# Altium PCB PCB.PCBDOC
Units mil, origin at the board's own origin, x right, y up, seen from the top; angles counter-clockwise.
Board outline 6000 x 4000 mil, 2 copper layers (Top Layer, Bottom Layer); 43 components, 0 nets, 165 pads, 7 vias.
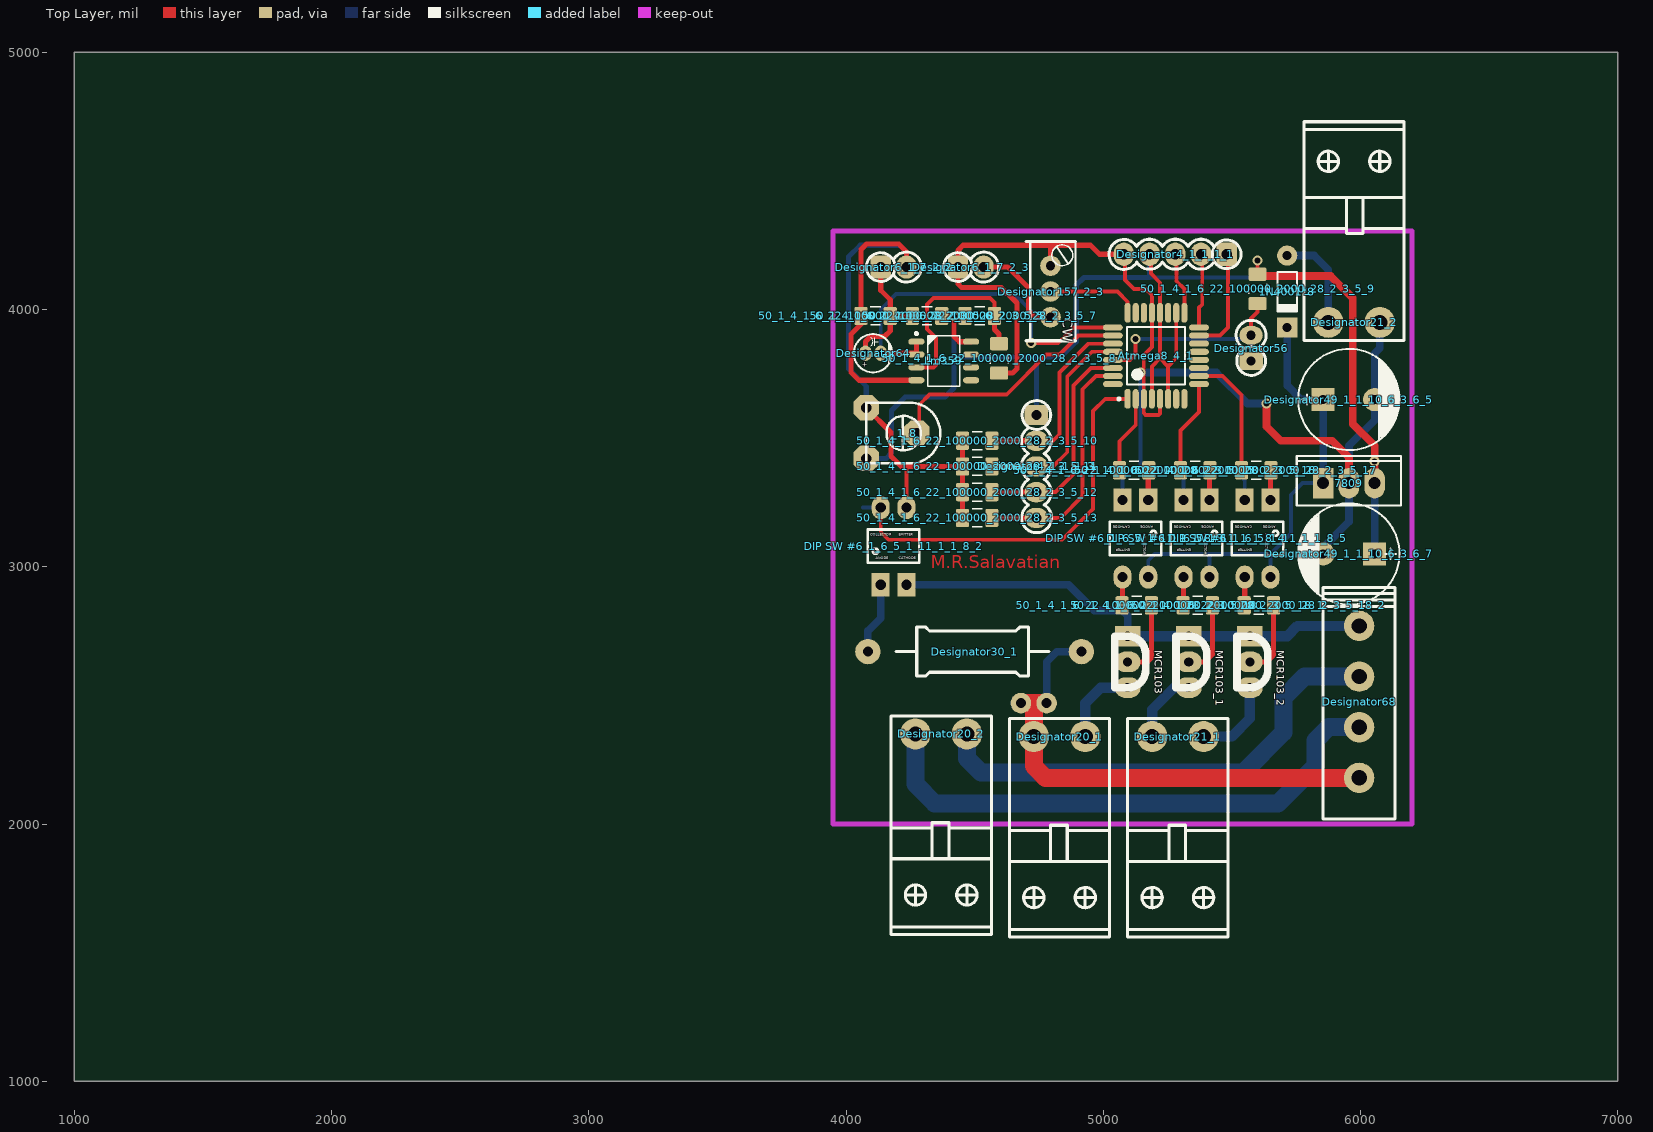
[diagram p0: Top Layer view]
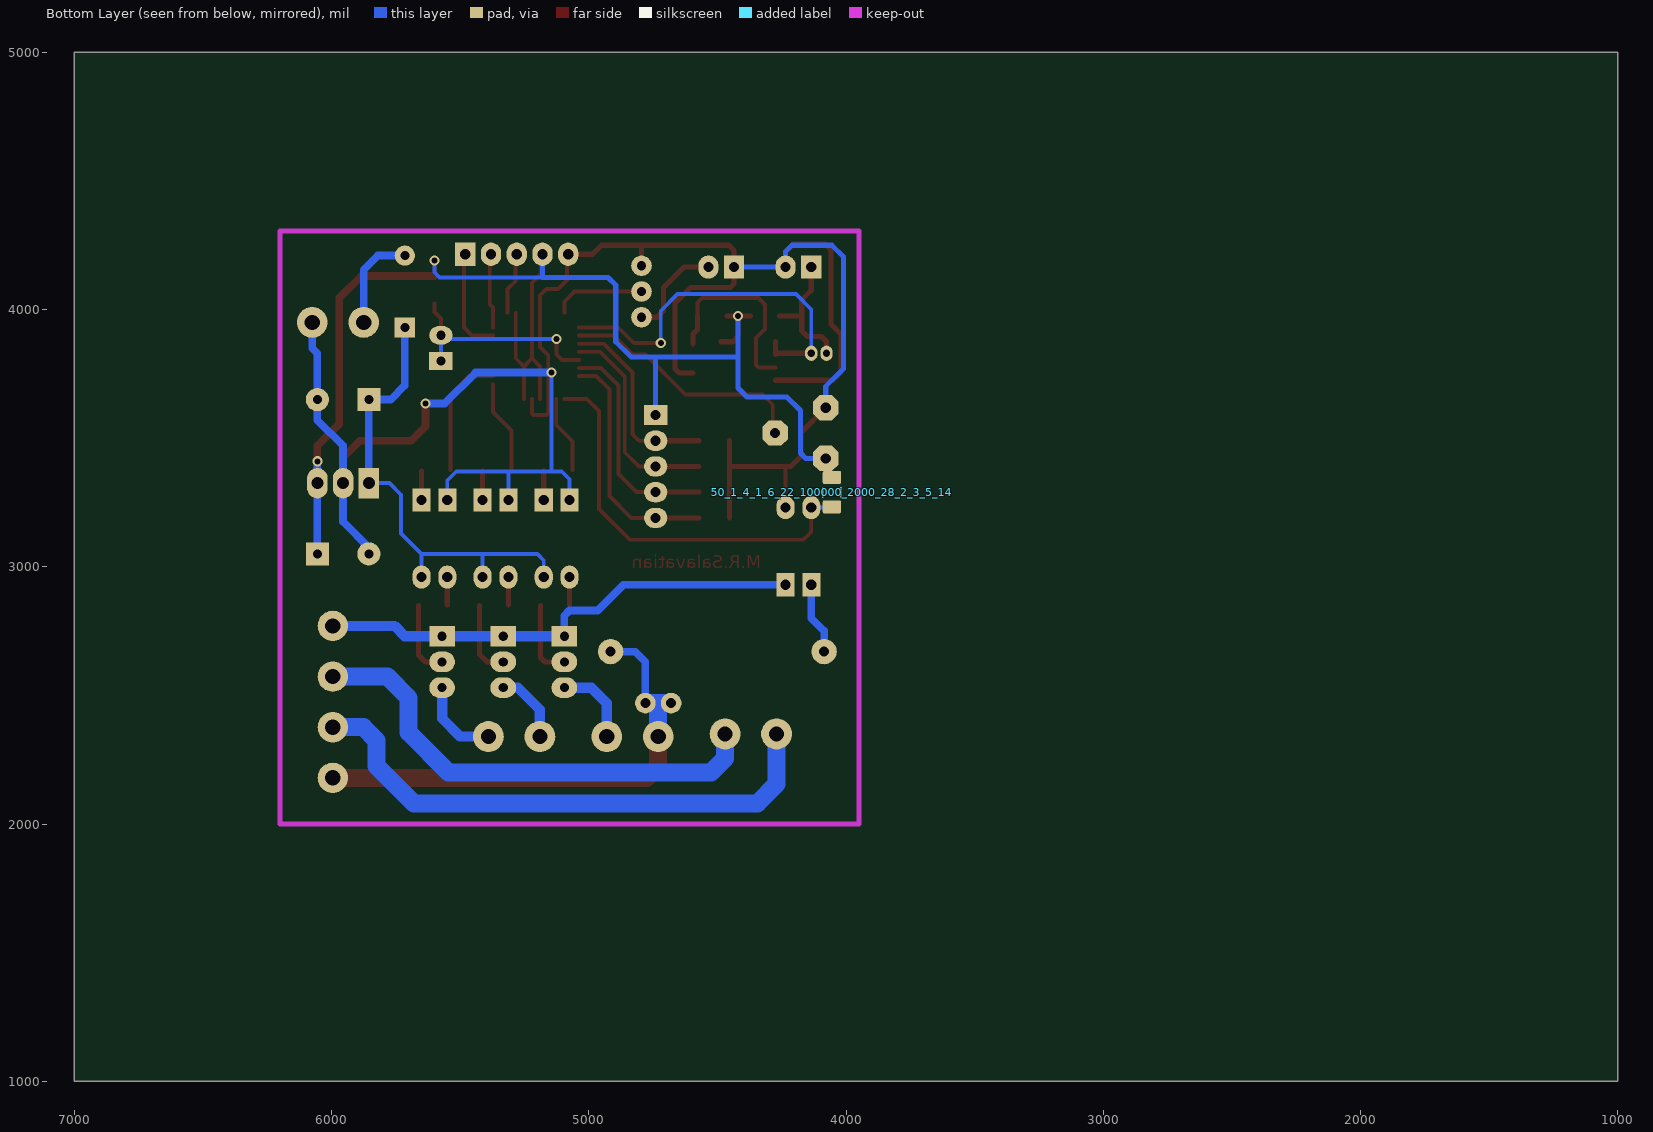
[diagram p1: Bottom Layer view, seen from below]

## Layer stack, top to bottom
Top Layer: signal copper 1.4
Dielectric: dielectric 12.6, FR-4, Dk 4.8
Bottom Layer: signal copper 1.4

## Board outline
1000,1000 7000,1000 7000,5000 1000,5000

## Design rules (kind name [scope] priority, off if disabled: settings)
Clearance [All] p1: gap=10
ComponentClearance [All] p1: gap=10 collisioncheckmode=3 verticalgap=10
PolygonConnect [All] p1: connectstyle=Relief reliefconductorwidth=10 reliefentries=4 polygonreliefangle="90 Angle"
RoutingVias [All] p1: holewidth=28 width=50 viastyle="Through Hole" minholewidth=28 minwidth=50 maxholewidth=28 maxwidth=50
SolderMaskExpansion [All] p1: expansion=4
TestPointUsage [All] p1: valid=0 allowmultiple=FALSE
Testpoint [All] p1: side=15 testpointundercomponent=TRUE minsize=40 maxsize=100 preferedsize=60 minholesize=0 maxholesize=40 preferedholesize=32 testpointgrid=1 style=1023 order=0-112345678
Width [All] p1: maxlimit=10 minlimit=10 preferedwidth=10
18 further rules are at their usual default settings.

## Components (designator, comment, footprint, x,y, rotation, side; value= is the part's Value field where it differs from the comment)
1N4001*8 "Comment" DIO7.1-3.9x1.9 5715,4070 r270 top
50_1_4_1_6_22_100000_2000_28_2_3_5_5 "Comment" RESC3216X70N 4315,3975 r180 top
50_1_4_1_6_22_100000_2000_28_2_3_5_6 "Comment" RESC3216X70N 4115,3975 r180 top
50_1_4_1_6_22_100000_2000_28_2_3_5_7 "Comment" RESC3216X70N 4520,3975 r180 top
50_1_4_1_6_22_100000_2000_28_2_3_5_8 "Comment" RESC3216X70N 4595,3810 r270 top
50_1_4_1_6_22_100000_2000_28_2_3_5_9 "Comment" RESC3216X70N 5600,4080 r90 top
50_1_4_1_6_22_100000_2000_28_2_3_5_10 "Comment" RESC3216X70N 4510,3490 r0 top
50_1_4_1_6_22_100000_2000_28_2_3_5_11 "Comment" RESC3216X70N 4510,3390 r0 top
50_1_4_1_6_22_100000_2000_28_2_3_5_12 "Comment" RESC3216X70N 4510,3290 r0 top
50_1_4_1_6_22_100000_2000_28_2_3_5_13 "Comment" RESC3216X70N 4510,3190 r0 top
50_1_4_1_6_22_100000_2000_28_2_3_5_14 "Comment" RESC3216X70N 4055,3290 r90 bottom
50_1_4_1_6_22_100000_2000_28_2_3_5_15 "Comment" RESC3216X70N 5120,3375 r0 top
50_1_4_1_6_22_100000_2000_28_2_3_5_16 "Comment" RESC3216X70N 5357.5,3375 r0 top
50_1_4_1_6_22_100000_2000_28_2_3_5_17 "Comment" RESC3216X70N 5595,3375 r0 top
50_1_4_1_6_22_100000_2000_28_2_3_5_18 "Comment" RESC3216X70N 5130,2850 r180 top
50_1_4_1_6_22_100000_2000_28_2_3_5_18_1 "Comment" RESC3216X70N 5367.5,2850 r180 top
50_1_4_1_6_22_100000_2000_28_2_3_5_18_2 "Comment" RESC3216X70N 5605,2850 r180 top
7809 "Comment" 221A-04 5955,3325 r0 top
_1_8 "P-1" VR-P1 4370,3500 r180 top
Atmega8_4_1 "Comment" My_32A_M 5205,3820 r90 top
Designator4_1_1_1_1 "Comment" SIP5 5480,4215 r180 top
Designator4_1_1_1_3 "Comment" SIP5 4740,3590 r270 top
Designator6_1_7_2_2 "Comment" SIP2#1 4135,4165 r0 top
Designator6_1_7_2_3 "Comment" SIP2#1 4435,4165 r0 top
Designator20_1 "Comment" PHONIX2 4730,2340 r180 top
Designator20_2 "Comment" PHONIX2 4270,2350 r180 top
Designator21_1 "Comment" PHONIX2 5190,2340 r180 top
Designator21_2 "Comment" PHONIX2 6075,3950 r0 top
Designator30_1 "Comment" AXIAL_1W 4195,2670 r0 top
Designator49_1_1_10_6_3_6_5 "Comment" "cap 04" 5955,3650 r180 top
Designator49_1_1_10_6_3_6_7 "Comment" "cap 04" 5955,3050 r0 top
Designator56 "Comment" SIP2#2 5575,3800 r90 top
Designator64 "Comment" "Cap electrolitic radial 4x7-1.5" 4135,3830 r180 top
Designator68 "Comment" BR_3 5995,2770 r0 top
Designator157_2_3 "Comment" "Multi Turn 02" 4795,4170 r0 top
"DIP SW #6_1_6_5_1_11_1_1_8_2" "Comment" "OPTO #1" 4135,2930 r0 top
"DIP SW #6_1_6_5_1_11_1_1_8_3" "Comment" "OPTO #1" 5175,3260 r180 top
"DIP SW #6_1_6_5_1_11_1_1_8_4" "Comment" "OPTO #1" 5412.5,3260 r180 top
"DIP SW #6_1_6_5_1_11_1_1_8_5" "Comment" "OPTO #1" 5650,3260 r180 top
Lm359 "Comment" SOIC127P600X175-8AN 4380,3800 r0 top
MCR103 "" 2N5551 5095,2730 r180 top
MCR103_1 "" 2N5551 5332.5,2730 r180 top
MCR103_2 "" 2N5551 5570,2730 r180 top

## Footprints (in the part's own frame and the unit in brackets; to place one, negate y for a bottom-side part, rotate by r counter-clockwise, add the part's x,y. Pads: shape width x height; smd on the part's side, far side on the other; paste and mask are expansions set on the pad)
2N5551 [mil]
  oval 100x80 hole 35.43: g(0,100) o(0,200)
  rect 100x80 hole 35.43: i(0,0)
  silkscreen extent -70,0 50,200
221A-04 [mm]
  oval 2.032x3 hole 1.2: A(0,0) G(2.54,0)
  rect 2.032x3 hole 1.2: K(-2.54,0)
  silkscreen extent -5.15,-2.2 5.15,2.7
AXIAL_1W [mm]
  round 2.5 hole 1: 1(-2.794,0) 2(18.288,0)
  silkscreen extent 0,-2.41 15.11,2.41
BR_3 [mm]
  round 3 hole 1.5: 1(0,-5) 2(0,-10) 3(0,0) 4(0,-15)
  silkscreen extent -3.56,-19.06 3.56,3.8
"cap 04" [mil]
  rect 90x90 hole 35.43: 1(100,0)
  round 90 hole 35.43: 2(-100,0)
  silkscreen extent -197,-197 197,197, body extent -198,-197 198,199, height 513
"Cap electrolitic radial 4x7-1.5" [mm] "Cap electrolitic radial 5x11-2-Design:Ali Hafizi"
  oval 1.2x1.5 hole 0.7: 1(0,0) 2(1.5,0)
  silkscreen extent -1.13,-1.88 2.65,1.88, body extent -1.25,-2 2.75,2, height 8.5
DIO7.1-3.9x1.9 [mm]
  round 2 hole 0.9: 1(-3.55,0)
  rect 2x2 hole 0.9: 2(3.55,0)
  silkscreen extent -1.95,-0.95 2.05,0.95
"Multi Turn 02" [mil]
  round 80 hole 35.43: 1(0,0) 2(0,-200) 3(0,-100)
  silkscreen extent -94,-291 96,94, body extent -73,-285 93,89, height 452
My_32A_M [mm]
  oct 1.95x0.6 smd: 1(-4.25,2.8)
  oval 0.6x1.95 smd: 10(-2,-4.25) 13(0.4,-4.25) 14(1.2,-4.25) 25(2.8,4.25) 26(2,4.25) 27(1.2,4.25) 32(-2.8,4.25) B0(-0.4,-4.25) C5(0.4,4.25) D5(-2.8,-4.25) D7(-1.2,-4.25) MISO(2.8,-4.25) MOSI(2,-4.25) RESET(-0.4,4.25) RX(-1.2,4.25) TX(-2,4.25)
  oval 1.95x0.6 smd: 19(4.25,-1.2) 22(4.25,1.2) 24(4.25,2.8) AREF(4.25,-0.4) AVCC(4.25,-2) B5/SCK(4.25,-2.8) C0(4.25,2) D4(-4.25,2) GND(-4.25,-0.4) GND(-4.25,1.2) GND(4.25,0.4) VCC(-4.25,-1.2) VCC(-4.25,0.4) XTAL(-4.25,-2.8) XTAL(-4.25,-2)
  silkscreen extent -4.37,-2.85 2.85,3.77, body extent -3.5,-3.5 3.5,3.5, height 1.2
"OPTO #1" [mil]
  rect 70x90 hole 39.37: ANODE(0,0) CATHODE(100,0)
  oval 70x90 hole 39.37: COLLECTOR(0,300) EMITTER(100,300)
  silkscreen extent -50,85 150,215
PHONIX2 [mil]
  round 120 hole 59.06: 1(0,0) 2(-200,0)
  silkscreen extent -295,-70 95,780
RESC3216X70N [mm] "Chip Resistor, Body 3.2x1.6mm, EIA 1206, IPC Medium Density"
  round 0.508 on Mech15: 0(0,0)
  rrect25% 1.3x1.8 smd: 1(-1.45,0) 2(1.45,0)
  silkscreen extent -0.51,-0.89 0.51,0.89, body extent -1.62,-0.82 1.63,0.83, height 0.69
SIP2#1 [mm]
  rect 2x2.3 hole 1: 1(0,0)
  oval 2x2.3 hole 1: 2(2.54,0)
  silkscreen extent -1.42,-1.48 4.02,1.48
SIP2#2 [mm]
  rect 1.8x2.3 hole 0.9: 1(0,0)
  oval 1.8x2.3 hole 0.9: 2(2.54,0)
  silkscreen extent -1.42,-1.48 4.02,1.48
SIP5 [mm]
  rect 2x2.3 hole 1: 1(0,0)
  oval 2x2.3 hole 1: 2(2.54,0) 3(5.08,0) 4(7.62,0) 5(10.16,0)
  silkscreen extent -1.42,-1.48 11.62,1.5
SOIC127P600X175-8AN [mm] "SOIC, 8-Leads, Body 4.9x3.9mm, Pitch 1.27mm, IPC Medium Density"
  round 1 on Mech15: 0(0,0)
  oval 1.6x0.6 smd: GND(-2.7,-1.905) O1(2.7,0.635) O2(-2.7,1.905) V1+(2.7,-1.905) V1-(2.7,-0.635) V2+(-2.7,-0.635) V2-(-2.7,0.635) VCC(2.7,1.905)
  silkscreen extent -2.82,-2.5 1.6,2.82, body extent -3,-2.45 3,2.45, height 1.75
VR-P1 [mm]
  oct 2.5x2.5 hole 1: 263(7.4,2) 264(7.4,-3) 266(2.4,-0.5)
  oct 0x0 all layers, no hole: 265(4.9,-0.5) 267(-0.1,-0.5)
  silkscreen extent 0.1,-3.5 7.4,2.5

## Part data
7809: library part MC7805BT

## Free pads (board coordinates)
  round 80 hole 39.37: 0(4680,2470) 1(4780,2470)

## Via types
v1: diameter 39.37, hole 23.62, Top Layer to Bottom Layer, 7 vias

## Nets (pads, with @x,y where several pads share a name; then routed paths per layer and width w, separated by ;. In a path a pad name is that pad's centre, name@x,y a point inside that pad or via, vN(x,y) a via of type N, cw(c..) or ccw(c..) an arc to the next point about the centre after c; other vN are vias at no path point)
pads on no net: 1N4001*8.1 1N4001*8.2 50_1_4_1_6_22_100000_2000_28_2_3_5_5.0 50_1_4_1_6_22_100000_2000_28_2_3_5_5.1 50_1_4_1_6_22_100000_2000_28_2_3_5_5.2 50_1_4_1_6_22_100000_2000_28_2_3_5_6.0 50_1_4_1_6_22_100000_2000_28_2_3_5_6.1 50_1_4_1_6_22_100000_2000_28_2_3_5_6.2 50_1_4_1_6_22_100000_2000_28_2_3_5_7.0 50_1_4_1_6_22_100000_2000_28_2_3_5_7.1 50_1_4_1_6_22_100000_2000_28_2_3_5_7.2 50_1_4_1_6_22_100000_2000_28_2_3_5_8.0 50_1_4_1_6_22_100000_2000_28_2_3_5_8.1 50_1_4_1_6_22_100000_2000_28_2_3_5_8.2 50_1_4_1_6_22_100000_2000_28_2_3_5_9.0 50_1_4_1_6_22_100000_2000_28_2_3_5_9.1 50_1_4_1_6_22_100000_2000_28_2_3_5_9.2 50_1_4_1_6_22_100000_2000_28_2_3_5_10.0 50_1_4_1_6_22_100000_2000_28_2_3_5_10.1 50_1_4_1_6_22_100000_2000_28_2_3_5_10.2 50_1_4_1_6_22_100000_2000_28_2_3_5_11.0 50_1_4_1_6_22_100000_2000_28_2_3_5_11.1 50_1_4_1_6_22_100000_2000_28_2_3_5_11.2 50_1_4_1_6_22_100000_2000_28_2_3_5_12.0 50_1_4_1_6_22_100000_2000_28_2_3_5_12.1 50_1_4_1_6_22_100000_2000_28_2_3_5_12.2 50_1_4_1_6_22_100000_2000_28_2_3_5_13.0 50_1_4_1_6_22_100000_2000_28_2_3_5_13.1 50_1_4_1_6_22_100000_2000_28_2_3_5_13.2 50_1_4_1_6_22_100000_2000_28_2_3_5_14.0 50_1_4_1_6_22_100000_2000_28_2_3_5_14.1 50_1_4_1_6_22_100000_2000_28_2_3_5_14.2 50_1_4_1_6_22_100000_2000_28_2_3_5_15.0 50_1_4_1_6_22_100000_2000_28_2_3_5_15.1 50_1_4_1_6_22_100000_2000_28_2_3_5_15.2 50_1_4_1_6_22_100000_2000_28_2_3_5_16.0 50_1_4_1_6_22_100000_2000_28_2_3_5_16.1 50_1_4_1_6_22_100000_2000_28_2_3_5_16.2 50_1_4_1_6_22_100000_2000_28_2_3_5_17.0 50_1_4_1_6_22_100000_2000_28_2_3_5_17.1 50_1_4_1_6_22_100000_2000_28_2_3_5_17.2 50_1_4_1_6_22_100000_2000_28_2_3_5_18.0 50_1_4_1_6_22_100000_2000_28_2_3_5_18.1 50_1_4_1_6_22_100000_2000_28_2_3_5_18.2 50_1_4_1_6_22_100000_2000_28_2_3_5_18_1.0 50_1_4_1_6_22_100000_2000_28_2_3_5_18_1.1 50_1_4_1_6_22_100000_2000_28_2_3_5_18_1.2 50_1_4_1_6_22_100000_2000_28_2_3_5_18_2.0 50_1_4_1_6_22_100000_2000_28_2_3_5_18_2.1 50_1_4_1_6_22_100000_2000_28_2_3_5_18_2.2 7809.A 7809.G 7809.K "DIP SW #6_1_6_5_1_11_1_1_8_2.ANODE" "DIP SW #6_1_6_5_1_11_1_1_8_2.CATHODE" "DIP SW #6_1_6_5_1_11_1_1_8_2.COLLECTOR" "DIP SW #6_1_6_5_1_11_1_1_8_2.EMITTER" "DIP SW #6_1_6_5_1_11_1_1_8_3.ANODE" "DIP SW #6_1_6_5_1_11_1_1_8_3.CATHODE" "DIP SW #6_1_6_5_1_11_1_1_8_3.COLLECTOR" "DIP SW #6_1_6_5_1_11_1_1_8_3.EMITTER" "DIP SW #6_1_6_5_1_11_1_1_8_4.ANODE" "DIP SW #6_1_6_5_1_11_1_1_8_4.CATHODE" "DIP SW #6_1_6_5_1_11_1_1_8_4.COLLECTOR" "DIP SW #6_1_6_5_1_11_1_1_8_4.EMITTER" "DIP SW #6_1_6_5_1_11_1_1_8_5.ANODE" "DIP SW #6_1_6_5_1_11_1_1_8_5.CATHODE" "DIP SW #6_1_6_5_1_11_1_1_8_5.COLLECTOR" "DIP SW #6_1_6_5_1_11_1_1_8_5.EMITTER" _1_8.263 _1_8.264 _1_8.265 _1_8.266 _1_8.267 Atmega8_4_1.1 Atmega8_4_1.10 Atmega8_4_1.13 Atmega8_4_1.14 Atmega8_4_1.19 Atmega8_4_1.22 Atmega8_4_1.24 Atmega8_4_1.25 Atmega8_4_1.26 Atmega8_4_1.27 Atmega8_4_1.32 Atmega8_4_1.AREF Atmega8_4_1.AVCC Atmega8_4_1.B0 Atmega8_4_1.B5/SCK Atmega8_4_1.C0 Atmega8_4_1.C5 Atmega8_4_1.D4 Atmega8_4_1.D5 Atmega8_4_1.D7 Atmega8_4_1.GND Atmega8_4_1.MISO Atmega8_4_1.MOSI Atmega8_4_1.RESET Atmega8_4_1.RX Atmega8_4_1.TX Atmega8_4_1.VCC Atmega8_4_1.XTAL Designator4_1_1_1_1.1 Designator4_1_1_1_1.2 Designator4_1_1_1_1.3 Designator4_1_1_1_1.4 Designator4_1_1_1_1.5 Designator4_1_1_1_3.1 Designator4_1_1_1_3.2 Designator4_1_1_1_3.3 Designator4_1_1_1_3.4 Designator4_1_1_1_3.5 Designator6_1_7_2_2.1 Designator6_1_7_2_2.2 Designator6_1_7_2_3.1 Designator6_1_7_2_3.2 Designator20_1.1 Designator20_1.2 Designator20_2.1 Designator20_2.2 Designator21_1.1 Designator21_1.2 Designator21_2.1 Designator21_2.2 Designator30_1.1 Designator30_1.2 Designator49_1_1_10_6_3_6_5.1 Designator49_1_1_10_6_3_6_5.2 Designator49_1_1_10_6_3_6_7.1 Designator49_1_1_10_6_3_6_7.2 Designator56.1 Designator56.2 Designator64.1 Designator64.2 Designator68.1 Designator68.2 Designator68.3 Designator68.4 Designator157_2_3.1 Designator157_2_3.2 Designator157_2_3.3 Lm359.0 Lm359.GND Lm359.O1 Lm359.O2 Lm359.V1+ Lm359.V1- Lm359.V2+ Lm359.V2- Lm359.VCC MCR103.g MCR103.i MCR103.o MCR103_1.g MCR103_1.i MCR103_1.o MCR103_2.g MCR103_2.i MCR103_2.o
copper on no net: | length 39899.1
  Top Layer w15: 4135,3230 4135,3135 4165,3105 4840,3105 4960,3225 4960,3605 5007.68,3652.68 5094.76,3652.68 ; 4235,3230 4235,3390 ; 4273.7,3775 4340,3775 4350,3785 4350,3890 4315,3925 4315,4020 4340,4045 4560,4045 4577.09,4027.91 4577.09,3975 ; 4285,3525 4285,3630 4325,3670 4625,3670 4780,3825 4830,3825 4903.74,3898.74 5037.68,3898.74 ; v1(4720,3870) 4825,3870 4885.24,3930.24 5037.68,3930.24 ; 4740,3190 4835,3190 4920,3275 4920,3690 4971.26,3741.26 5037.68,3741.26 ; 4740,3290 4815,3290 4885,3360 4885,3705 4952.76,3772.76 5037.68,3772.76 ; 4740,3390 4805,3390 4860,3445 4860,3740 4955.75,3835.75 5037.68,3835.75 ; 4740,3490 4805,3490 4830,3515 4830,3755 4942.24,3867.24 5037.68,3867.24 ; 4795,4070 5055,4070 5094.76,4030.24 5094.76,3987.32 ; 5037.68,3804.25 5104.25,3804.25 5125,3825 v1(5125,3885) ; 5062.91,3375 5062.91,3487.91 5126.26,3551.26 5126.26,3652.68 ; 5085,4215 5085,4115 5120,4080 5165,4080 5189.25,4055.75 5189.25,3987.32 5189.25,3854.25 5157.76,3822.76 5157.76,3652.68 5157.76,3597.24 5165,3590 5215,3590 5220.75,3595.75 5220.75,3652.68 ; 5185,4215 5185,4140 5220.75,4104.25 5220.75,3987.32 5220.75,3810.75 ; 5189.25,3652.68 5189.25,3779.25 5220.75,3810.75 ; 5252.24,3652.68 5252.24,3779.25 ; 5283.74,3987.32 5283.74,3810.75 5252.24,3779.25 ; 5285,4215 5285,4110 5315.24,4079.76 5315.24,3987.32 ; 5300.41,3375 5300.41,3530.41 5372.32,3602.32 5372.32,3709.76 ; 5372.32,3741.26 5463.74,3741.26 5537.91,3667.09 5537.91,3375 ; 5372.32,3898.74 5453.74,3898.74 5485,3930 5485,4215 ; 5372.32,3930.24 5372.32,4007.32 5385,4020 5385,4215 ; 5575,3900 5575,3965 5600,3990 5600,4022.91 ; 5600,4130 v1(5600,4190) ; 5220.75,3810.75 5252.24,3779.25
  Top Layer w20: 4075.94,3830 4075.94,3875.94 4095,3895 4150,3895 4172.09,3917.09 4172.09,3975 ; 4078.66,3618.11 4175,3521.77 4175,3430 4215,3390 4452.91,3390 ; 4135,3830 4268.7,3830 ; 4135,4165 4135,4075 4172.09,4037.91 4172.09,3975 ; 4235,4165 4235,4225 4205,4255 4080,4255 4057.91,4232.91 4057.91,3975 4057.91,3942.91 4020,3905 4020,3755 4050,3725 4273.7,3725 ; 4257.91,3975 4172.09,3975 ; 4273.7,3825 4273.7,3875 ; 4372.09,3975 4462.91,3975 ; v1(4420,3975) 4420,3895 4440,3875 4486.3,3875 ; 4452.91,3190 4452.91,3490 ; 4535,4165 4630,4165 4710,4085 4710,3995 4735,3970 4795,3970 ; 4572.09,3190 4740,3190 ; 4572.09,3290 4740,3290 ; 4572.09,3390 4740,3390 ; 4572.09,3490 4740,3490 ; 4577.09,3975 4577.09,3922.91 4595,3905 4595,3867.09 ; 4595,3752.91 4647.91,3752.91 4665,3770 4665,4025 4605,4085 4450,4085 4435,4100 4435,4165 4435,4230 4455,4250 4795,4250 ; 4795,4170 4795,4250 ; 5075,2852.09 5075,2960 ; 5080,4215 4985,4215 4950,4250 4795,4250 ; 5095,2630 5170,2630 5187.09,2647.09 5187.09,2850 ; 5175,3260 5175,3372.91 ; 5312.5,2852.09 5312.5,2960 ; 5332.5,2630 5395,2630 5424.59,2659.59 5424.59,2850 ; 5412.5,3260 5412.5,3372.91 ; 5550,2852.09 5550,2960 ; 5570,2630 5635,2630 5662.09,2657.09 5662.09,2850 ; 5650,3260 5650,3372.91
  Top Layer w30: 5600,4130 5885,4130 5970,4045 5970,3555 6055,3470 6055,3325 ; v1(5635,3635) 5635,3545 5690,3490 5890,3490 5955,3425 5955,3325
  Top Layer w40: 4680,2470 4780,2470
  Top Layer w70: 4680,2470 4780,2470 ; 4730,2470 4730,2225 4775.55,2179.45 5995,2179.45
  Bottom Layer w15: 4065,3230 4135,3230 ; 4135,3830 4135,4000 4195,4060 4655,4060 4720,3995 v1(4720,3870) ; 5075,3260 5075,3340 5105,3370 5515,3370 5550,3335 5550,3260 ; v1(5125,3885) 5570,3885 ; 5145,3375 v1(5145,3755) ; 5175,2960 5175,3025 5200,3050 5650,3050 ; 5180,4125 5580,4125 5600,4145 v1(5600,4190) ; 5312.5,3260 5312.5,3367.5 ; 5412.5,2960 5412.5,3047.5 ; 5575,3800 5575,3900 ; 5650,2960 5650,3050 ; 5855,3325 5775,3325 5730,3280 5730,3130 5650,3050
  Bottom Layer w20: 4078.66,3421.26 4156.26,3421.26 4177.09,3442.09 4177.09,3607.09 4230,3660 4385,3660 4420,3695 v1(4420,3975) ; 4078.66,3618.11 4078.66,3701.34 4010,3770 4010,4205 4055,4250 4210,4250 4235,4225 4235,4165 4435,4165 ; 4420,3815 4835,3815 4895,3875 4895,4095 4925,4125 5180,4125 5180,4215 ; 4740,3590 4740,3810
  Bottom Layer w30: 4085,2670 4085,2750 4135,2800 4135,2930 ; 4235,2930 4865,2930 4965,2830 5075,2830 5095,2810 5095,2730 ; 4780,2470 4780,2630 4820,2670 4915,2670 ; v1(5145,3755) 5440,3755 5560,3635 v1(5635,3635) ; 5715,3930.24 5715,3705 5770,3650 5855,3650 5855,3330 ; 5715,4209.76 5820.24,4209.76 5875,4155 5875,3950 ; 5855,3050 5855,3075 5955,3175 5955,3325 ; 5965,3325 5955,3335 5955,3470 6055,3570 6055,3830 6075,3850 6075,3950 ; 6055,3050 6055,3325 v1(6055,3410)
  Bottom Layer w40: 4680,2470 4780,2470 ; 4730,2340 4730,2470 ; 4930,2340 4930,2470 4990,2530 5095,2530 ; 5095,2730 5715,2730 5755,2770 5995,2770 ; 5190,2340 5190,2445 5275,2530 5332.5,2530 ; 5390,2340 5500,2340 5570,2410 5570,2530
  Bottom Layer w70: 4270,2350 4270,2155 4345,2080 5680,2080 5825,2225 5825,2325 5876.3,2376.3 5995,2376.3 ; 4470,2350 4470,2255 4525,2200 5545,2200 5700,2355 5700,2490 5783.15,2573.15 5995,2573.15 ; 4675,2470 4780,2470 ; 4730,2340 4730,2470

## Keep-outs
Keep-Out Layer:
  lines w20: 3950,2000 6200,2000 6200,4305 3950,4305 3950,2000

## Other copper
Top Layer:
  text "M.R.Salavatian" at 4330,2995 h50

## Text inside footprints (layer, text, board x,y; h text height)
Designator64: Top Overlay "+" at 4085,3795 h19.68 r180
Designator157_2_3: Top Overlay "CW" at 4843,3967 h39.37 r270
"DIP SW #6_1_6_5_1_11_1_1_8_2": Top Overlay "EMITTER" at 4205,3120 h10; Top Overlay "COLLECTOR" at 4095,3120 h10; Top Overlay "CATHODE" at 4205,3030 h10; Top Overlay "ANODE" at 4115,3030 h10
"DIP SW #6_1_6_5_1_11_1_1_8_3": Top Overlay "EMITTER" at 5105,3070 h10 r180; Top Overlay "COLLECTOR" at 5155,3130 h10 r270; Top Overlay "CATHODE" at 5105,3160 h10 r180; Top Overlay "ANODE" at 5195,3160 h10 r180
"DIP SW #6_1_6_5_1_11_1_1_8_4": Top Overlay "EMITTER" at 5342.5,3070 h10 r180; Top Overlay "COLLECTOR" at 5392.5,3130 h10 r270; Top Overlay "CATHODE" at 5342.5,3160 h10 r180; Top Overlay "ANODE" at 5432.5,3160 h10 r180
"DIP SW #6_1_6_5_1_11_1_1_8_5": Top Overlay "EMITTER" at 5580,3070 h10 r180; Top Overlay "COLLECTOR" at 5630,3130 h10 r270; Top Overlay "CATHODE" at 5580,3160 h10 r180; Top Overlay "ANODE" at 5670,3160 h10 r180